# Altium PCB PCB_version_1.1.PcbDoc
Units mm, origin at the board's own origin, x right, y up, seen from the top; angles counter-clockwise.
Board outline 218.55 x 75.78 mm, 2 copper layers (Top Layer, Bottom Layer), stack 1.571 mm thick; 15 components, 68 nets, 287 pads, 0 vias.
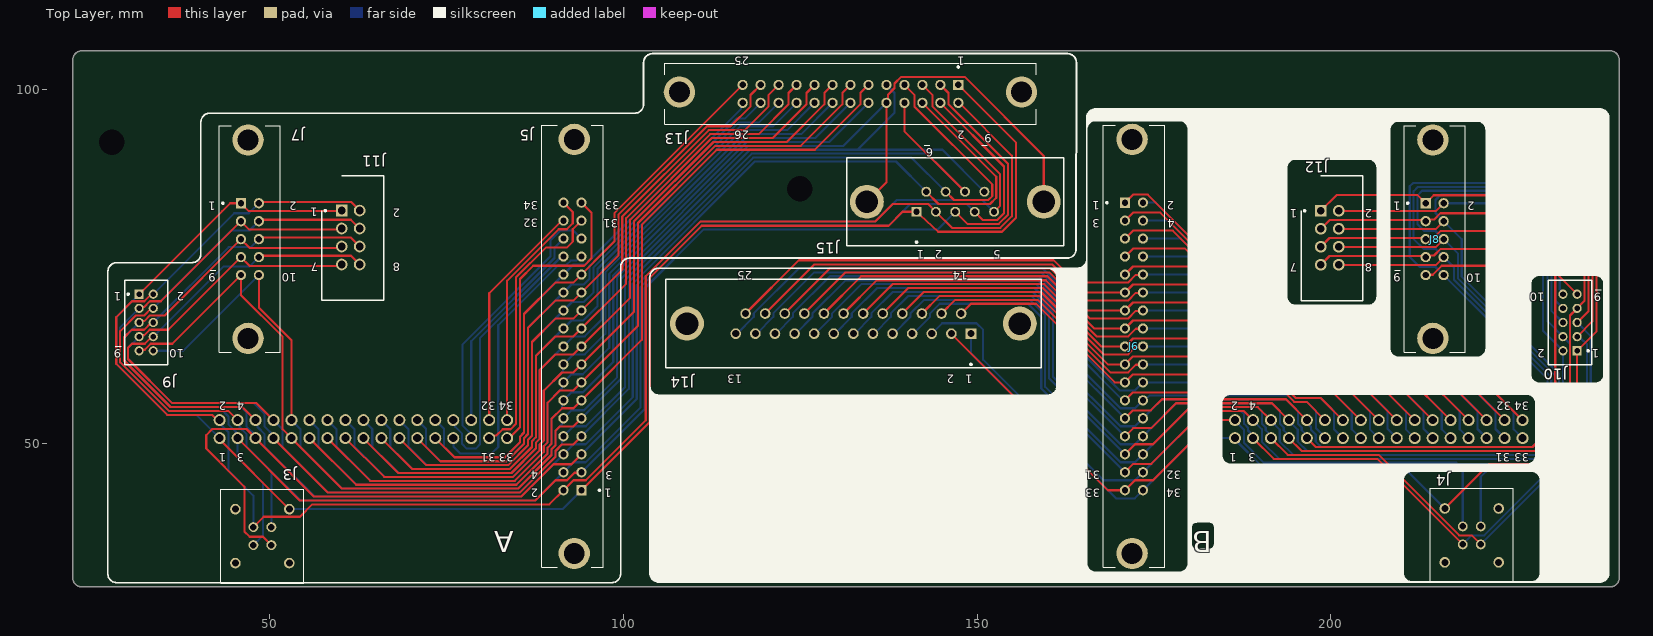
[diagram p0: Top Layer view]
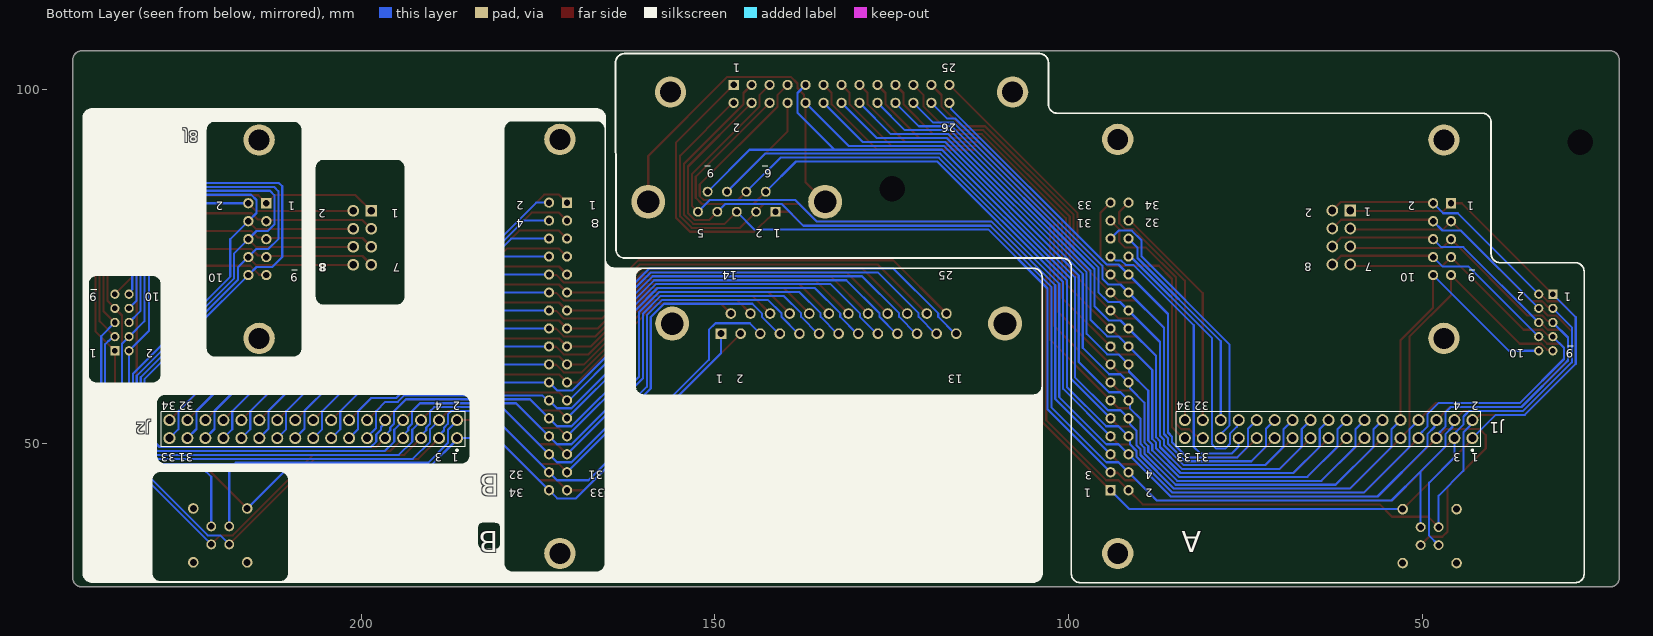
[diagram p1: Bottom Layer view, seen from below]
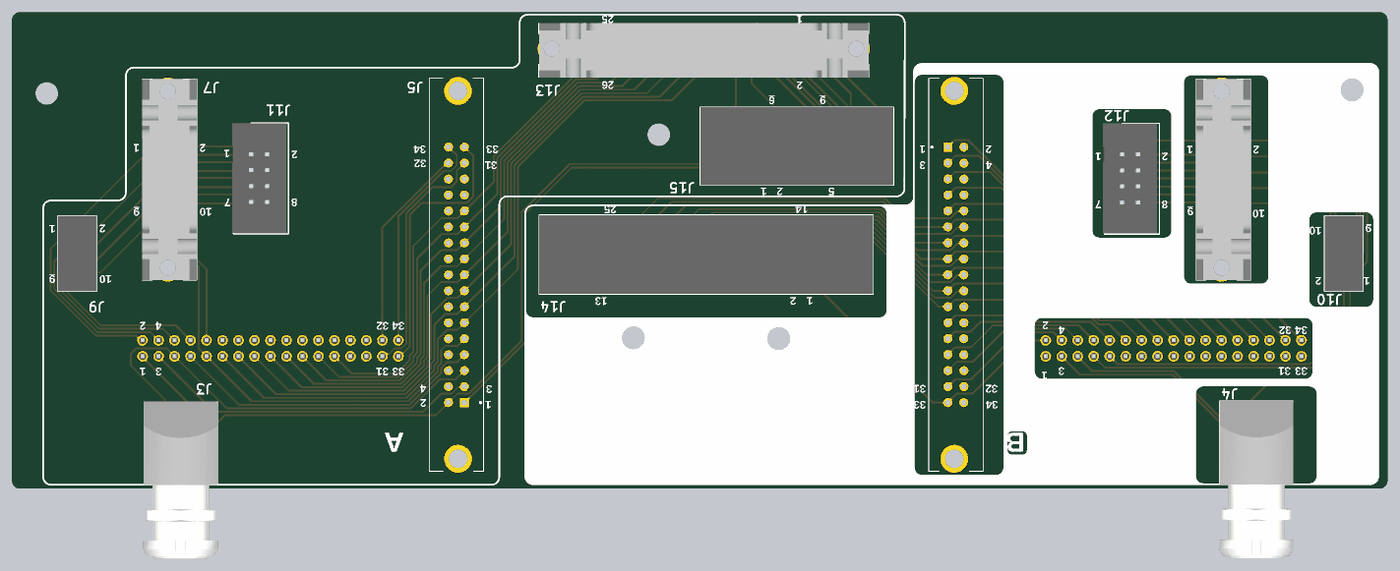
[diagram p2: 3D render of the assembled board from above, using the file's embedded part models]

## Layer stack, top to bottom
Top Solder: solder mask 0.0102, Solder Resist, Dk 3.5
Top Layer: signal copper 0.0356
Dielectric 1: dielectric 1.5, FR-4, Dk 4.8
Bottom Layer: signal copper 0.0356
Bottom Solder: solder mask 0.0102, Solder Resist, Dk 3.5

## Board outline
23.47,29.725 25.67,29.725 27.42,29.725 39.622,29.725 42.325,29.725 215.35,29.725 229.58,29.725 239.48,29.725 ccw(c239.48,30.995) 240.75,30.995 240.75,43.368 240.75,95 240.75,104.23 ccw(c239.48,104.23) 239.48,105.5 229.58,105.5 27.42,105.5 25.67,105.5 23.47,105.5 ccw(c23.47,104.23) 22.2,104.23 22.2,99.772 22.2,36.482 22.2,30.995 ccw(c23.47,30.995)

## Design rules (kind name [scope] priority, off if disabled: settings)
Clearance [All] p1: gap=0.1 ignorepadtopadclearanceinfootprint=FALSE except(0.254: Arc-Arc Arc-Track Track-Track)
HoleSize [All] p1: absolutevalues=TRUE maxlimit=6 minlimit=0.2 maxpercent=80.000 minpercent=20.000
PolygonConnect [All] p1: connectstyle=Relief reliefconductorwidth=0.254 reliefentries=4 polygonreliefangle="90 Angle" airgapwidth=0.254
RoutingVias [All] p1: holewidth=0.711 width=1.27 viastyle="Through Hole" minholewidth=0.711 minwidth=1.27 maxholewidth=0.711 maxwidth=1.27
SilkToSilkClearance SilkToSilkClearance_BottomOverlay [IsObjectKind('Text') And OnLayer('Bottom Overlay')] p1: silktosilkclearance=0
SilkToSilkClearance SilkToSilkClearance_TopOverlay [IsObjectKind('Text') And OnLayer('Top Overlay')] p2: silktosilkclearance=0
SilkToSilkClearance [All] p3: silktosilkclearance=0.254
SolderMaskExpansion [All] p1: expansion=0.102 istentingtop=FALSE
Width [All] p1: maxlimit=10 minlimit=0.1 preferedwidth=0.3
28 further rules are at their usual default settings.

## Components (designator, comment, footprint, x,y, rotation, side; value= is the part's Value field where it differs from the comment)
J1 "ESQ-117-33-T-D" ESQ-117-Y-X-D 42.95,50.757 r180 bottom locked
J2 "ESQ-117-33-T-D" ESQ-117-Y-X-D 186.45,50.757 r180 bottom
J3 "EXP.0S.304.HLN" EXP0S304HLN 50.26,38.18 r270 top
J4 "EXP.0S.304.HLN" EXP0S304HLN 221.18,38.28 r270 top
J5 "D3431-6002-AR" D3431-6002-AR 94.085,43.4 r90 top locked
J6 "D3431-6002-AR" D3431-6002-AR 170.9,84.04 r270 top
J7 "D3793-6002-AR" D3793-6002-AR 45.96,83.96 r270 top
J8 "D3793-6002-AR" D3793-6002-AR 213.4,83.96 r270 top
J9 "98414-G08-10LF" 98414G0810LF 31.575,71.1 r270 top
J10 "98414-G08-10LF" 98414G0810LF 234.8,63.1 r90 top
J11 "N2508-6002-RB" SHDR8W64P254_2X4_1748X859X1004P 60.2,82.92 r270 top
J12 "N2508-6002-RB" SHDR8W64P254_2X4_1748X859X1004P 198.58,82.883 r270 top
J13 "D3429-6302-AR" D34296302AR 147.35,100.682 r180 top locked
J14 "L17HTNBHPOL2RM84C" L17HTNBHPOL2RM84C 149.135,65.527 r180 top locked
J15 "L177DFE09ST" L177DFE09ST 141.44,82.747 r180 top

## Footprints (in the part's own frame and the unit in brackets; to place one, negate y for a bottom-side part, rotate by r counter-clockwise, add the part's x,y. Pads: shape width x height; smd on the part's side, far side on the other; paste and mask are expansions set on the pad)
98414G0810LF [mm]
  rect 1.3x1.3 hole 0.8: A1(0,0)
  round 1.3 hole 0.8: A2(2,0) A3(4,0) A4(6,0) A5(8,0) B1(0,2) B2(2,2) B3(4,2) B4(6,2) B5(8,2)
  silkscreen extent -2,-2.05 10,4.05, body extent -2,-2.05 10,4.05, height 6.3
D3431-6002-AR [mm]
  rect 1.446x1.446 hole 0.89: 1(0,0)
  round 1.446 hole 0.89: 2(0,2.54) 3(2.54,0) 4(2.54,2.54) 5(5.08,0) 6(5.08,2.54) 7(7.62,0) 8(7.62,2.54) 9(10.16,0) 10(10.16,2.54) 11(12.7,0) 12(12.7,2.54) 13(15.24,0) 14(15.24,2.54) 15(17.78,0) 16(17.78,2.54) 17(20.32,0) 18(20.32,2.54) 19(22.86,0) 20(22.86,2.54) 21(25.4,0) 22(25.4,2.54) 23(27.94,0) 24(27.94,2.54) 25(30.48,0) 26(30.48,2.54) 27(33.02,0) 28(33.02,2.54) 29(35.56,0) 30(35.56,2.54) 31(38.1,0) 32(38.1,2.54) 33(40.64,0) 34(40.64,2.54)
  round 4.425 hole 2.95: MH1(-8.941,1.016) MH2(49.581,1.016)
  silkscreen extent -10.92,-3.05 51.56,5.59
D3793-6002-AR [mm] "Connector"
  rect 1.446x1.446 hole 0.89: 1(0,0)
  round 1.446 hole 0.89: 2(0,2.54) 3(2.54,0) 4(2.54,2.54) 5(5.08,0) 6(5.08,2.54) 7(7.62,0) 8(7.62,2.54) 9(10.16,0) 10(10.16,2.54)
  round 4.425 hole 2.95: MH1(-8.941,1.016) MH2(19.101,1.016)
  silkscreen extent -10.92,-3.05 21.08,5.59, body extent -10.93,-3.06 21.08,5.58, height 17.27
D34296302AR [mm]
  rect 1.446x1.446 hole 0.89: 1(0,0)
  round 1.446 hole 0.89: 2(0,2.54) 3(2.54,0) 4(2.54,2.54) 5(5.08,0) 6(5.08,2.54) 7(7.62,0) 8(7.62,2.54) 9(10.16,0) 10(10.16,2.54) 11(12.7,0) 12(12.7,2.54) 13(15.24,0) 14(15.24,2.54) 15(17.78,0) 16(17.78,2.54) 17(20.32,0) 18(20.32,2.54) 19(22.86,0) 20(22.86,2.54) 21(25.4,0) 22(25.4,2.54) 23(27.94,0) 24(27.94,2.54) 25(30.48,0) 26(30.48,2.54)
  round 4.425 hole 2.95: MH1(-8.941,1.016) MH2(39.421,1.016)
  silkscreen extent -10.98,-3.03 41.46,5.57, body extent -10.96,-3.07 41.36,5.57, height 17.27
ESQ-117-Y-X-D [mm]
  round 1.7 hole 1.15: 1(0,0) 2(0,2.54) 3(-2.54,0) 4(-2.54,2.54) 5(-5.08,0) 6(-5.08,2.54) 7(-7.62,0) 8(-7.62,2.54) 9(-10.16,0) 10(-10.16,2.54) 11(-12.7,0) 12(-12.7,2.54) 13(-15.24,0) 14(-15.24,2.54) 15(-17.78,0) 16(-17.78,2.54) 17(-20.32,0) 18(-20.32,2.54) 19(-22.86,0) 20(-22.86,2.54) 21(-25.4,0) 22(-25.4,2.54) 23(-27.94,0) 24(-27.94,2.54) 25(-30.48,0) 26(-30.48,2.54) 27(-33.02,0) 28(-33.02,2.54) 29(-35.56,0) 30(-35.56,2.54) 31(-38.1,0) 32(-38.1,2.54) 33(-40.64,0) 34(-40.64,2.54)
  silkscreen extent -41.82,-1.83 1.18,3.74, body extent -42.14,-1.25 1.54,3.83, height 1.81
EXP0S304HLN [mm]
  round 1.4 hole 0.9: 1(0,0) 2(0,-2.54) 3(2.54,-2.54) 4(2.54,0)
  round 1.5 hole 1: G1(-2.54,2.54) G2(-2.54,-5.08) G3(5.08,-5.08) G4(5.08,2.54)
  silkscreen extent -5.38,-7.12 7.92,4.58, body extent -5.38,-7.19 19.62,4.65, height 13.78
L17HTNBHPOL2RM84C [mm]
  rect 1.5x1.5 hole 1: 1(0,0)
  round 1.5 hole 1: 2(2.77,0) 3(5.54,0) 4(8.31,0) 5(11.08,0) 6(13.85,0) 7(16.62,0) 8(19.39,0) 9(22.16,0) 10(24.93,0) 11(27.7,0) 12(30.47,0) 13(33.24,0) 14(1.385,-2.84) 15(4.155,-2.84) 16(6.925,-2.84) 17(9.695,-2.84) 18(12.465,-2.84) 19(15.235,-2.84) 20(18.005,-2.84) 21(20.775,-2.84) 22(23.545,-2.84) 23(26.315,-2.84) 24(29.085,-2.84) 25(31.855,-2.84)
  round 4.8 hole 3.2: MH1(-6.9,-1.42) MH2(40.14,-1.42)
  silkscreen extent -9.9,-7.7 43.14,4.85, body extent -9.9,-7.7 43.14,4.85, height 12.6
L177DFE09ST [mm]
  rect 1.4x1.4 hole 0.9: 1(0,0)
  round 1.4 hole 0.9: 2(-2.74,0) 3(-5.48,0) 4(-8.22,0) 5(-10.96,0) 6(-1.37,-2.84) 7(-4.11,-2.84) 8(-6.85,-2.84) 9(-9.59,-2.84)
  round 4.8 hole 3.2: MH1(7.02,-1.42) MH2(-17.98,-1.42)
  silkscreen extent -20.83,-7.62 9.87,4.78, body extent -20.83,-7.62 9.87,4.78, height 12.3
SHDR8W64P254_2X4_1748X859X1004P [mm]
  rect 1.65x1.65 hole 1.1: 1(0,0)
  round 1.65 hole 1.1: 2(0,2.54) 3(2.54,0) 4(2.54,2.54) 5(5.08,0) 6(5.08,2.54) 7(7.62,0) 8(7.62,2.54)
  silkscreen extent -4.93,-2.8 12.68,5.92, body extent -4.93,-3.03 12.55,5.57, height 10.04

## Part data
J1 J2: "Connector", Manufacturer_Name=SAMTEC, Manufacturer_Part_Number=ESQ-117-44-T-D, Mouser Part Number=200-ESQ11744TD, Datasheet Link=http://suddendocs.samtec.com/prints/esq-1xx-xx-x-x-xxx-xx-x-xx-mkt.pdf, Mouser Price/Stock=https://www.mouser.com/Search/Refine.aspx?Keyword=200-ESQ11744TD
J3 J4: "Connector", Manufacturer_Name=LEMO, Mouser Part Number=736-EXP0S304HLN, Datasheet Link=https://www.lemo.com/catalog/ROW/UK_English/unipole_multipole.pdf, Height=12mm, Manufacturer_Part_Number=EXP.0S.304.HLN, Mouser Price/Stock=https://www.mouser.co.uk/ProductDetail/LEMO/EXP0S304HLN?qs=g4eXmMl0IezC49McAy%252Bbog%3D%3D
J5 J6 J7 J8: "Connector"
J9 J10: "Connector", Manufacturer_Name=Amphenol, Mouser Part Number=649-98414-G08-10LF, Datasheet Link=https://cdn.amphenol-cs.com/media/wysiwyg/files/drawing/98414.pdf, Height=6.2mm, Manufacturer_Part_Number=98414-G08-10LF, Mouser Price/Stock=https://www.mouser.co.uk/ProductDetail/Amphenol-FCI/98414-G08-10LF?qs=dwWE9K4rTrPm8sS0qAKvPg%3D%3D
J11 J12: "Connector", Manufacturer_Name=3M, Mouser Part Number=517-N2508-6002-RB, Datasheet Link=https://multimedia.3m.com/mws/media/330367O/3m-four-wall-header-2500-series-ts-0770.pdf, Height=10.04mm, Manufacturer_Part_Number=N2508-6002-RB, Mouser Price/Stock=https://www.mouser.com/Search/Refine.aspx?Keyword=517-N2508-6002-RB
J13: "Connector", Manufacturer_Name=3M, Mouser Part Number=517-D3429-6302-AR, Datasheet Link=http://multimedia.3m.com/mws/media/485761O/3mtm-four-wall-header-ts2245.pdf, Height=13.7mm, Manufacturer_Part_Number=D3429-6302-AR, Mouser Price/Stock=https://www.mouser.co.uk/ProductDetail/3M-Electronic-Solutions-Division/D3429-6302-AR?qs=IDj0%2FmHVFfaTU4HTZsyChw%3D%3D
J14: "Connector", Manufacturer_Name="Amphenol Communications Solutions", Mouser Part Number=523-17HTNBHPOL2RM84C, Datasheet Link=https://cdn.amphenol-cs.com/media/wysiwyg/files/drawing/l17htnxhpol2rm8xc.pdf, Height=12.5mm, Manufacturer_Part_Number=L17HTNBHPOL2RM84C, Mouser Price/Stock=https://www.mouser.co.uk/ProductDetail/Amphenol-Commercial-Products/L17HTNBHPOL2RM84C?qs=ToP8pWlZ0bO6Ujv8%2FJibmw%3D%3D
J15: "Connector", Manufacturer_Name=Amphenol, Datasheet Link=https://cdn.amphenol-cs.com/media/wysiwyg/files/drawing/l177dfxxxst.pdf, Height=12.2mm, Manufacturer_Part_Number=L177DFE09ST

## Free pads (board coordinates)
  round 0 hole 3.6 unplated: HOLE1(120.925,53.7) HOLE2(144.025,53.575) HOLE3(27.73,92.566) HOLE4(235.12,93.137) HOLE5(124.97,86.007)

## Nets (pads, with @x,y where several pads share a name; then routed paths per layer and width w, separated by ;. In a path a pad name is that pad's centre, name@x,y a point inside that pad or via, vN(x,y) a via of type N, cw(c..) or ccw(c..) an arc to the next point about the centre after c; other vN are vias at no path point)
PA1: J1.1 J3.G1 J5.1 J7.1 J9.A1 J11.1 J13.1 J15.1 | length 234.8
  Top Layer w0.3: J9.A1 32.075,71.6 43.308,82.833 44.435,83.96 J7.1 47.087,82.833 60.113,82.833 J11.1 ; J1.1 42.95,50.57 J3.G1 ; J5.1 103.732,53.047 103.732,73.422 111.089,80.779 137.501,80.779 139.469,82.747 J15.1 141.99,82.243 144.517,79.925 153.525,79.925 155.475,81.875 155.475,92.557 J13.1
  Bottom Layer w0.3: J9.A1 28.338,67.863 28.338,61.262 35.55,54.05 39.657,54.05 J1.1 ; J3.G1 91.405,40.72 J5.1
PA2: J1.2 J3.2 J5.2 J7.2 J9.B1 J11.2 J13.2 J15.2 | length 242.6
  Top Layer w0.3: J9.B1 33.307,71.1 32.307,70.1 30.575,70.1 28.338,67.863 28.338,61.262 35.55,54.05 41.865,54.05 42.618,53.297 J1.2 ; J3.2 49.19,39.65 54.304,39.65 56.052,41.398 89.543,41.398 J5.2 92.958,44.813 94.715,44.813 103.178,53.276 103.178,73.651 110.889,81.363 134.403,81.363 ccw(c134.42,84.167) 134.437,81.363 135.582,81.363 138.069,83.851 143.076,83.851 J15.2 144.18,82.745 146.446,80.479 153.296,80.479 154.921,82.104 154.921,90.684 147.463,98.142 J13.2 ; J7.2 48.689,84.149 61.511,84.149 J11.2
  Bottom Layer w0.3: J9.B1@33.617,71.142 45.022,82.547 47.087,82.547 J7.2 ; J1.2 42.95,52.826 44.225,51.551 44.225,46.125 47.72,42.63 J3.2
PA3: J1.3 J3.3 J5.3 J7.3 J9.A2 J11.3 J13.3 J15.3 | length 245.2
  Top Layer w0.3: J9.A2 31.766,69.291 32.282,69.291 33.09,70.1 34.64,70.1 J7.3 47.155,80.225 60.045,80.225 J11.3 ; J1.3 54.295,41.952 87.557,41.952 90.418,44.813 92.038,44.813 93.096,45.871 94.016,45.871 J5.3 ; J13.3 145.956,99.536 145.956,97.942 154.367,89.531 154.367,82.334 153.066,81.033 148.634,81.033 J15.3
  Bottom Layer w0.3: J9.A2 28.892,66.417 28.892,61.491 35.779,54.604 43.41,54.604 43.753,54.261 43.79,54.227 cw(c42.95,53.297) 43.881,54.137 43.914,54.1 44.137,53.877 44.225,53.789 44.225,52.664 45.222,51.667 45.222,51.024 J1.3 45.49,48.03 49.064,44.456 49.064,36.984 J3.3@47.729,35.649 ; J5.3@94.095,45.94 103.006,54.851 103.006,71.913 111.318,80.225 144.398,80.225 J15.3
PA4: J1.4 J3.1 J5.4 J7.4 J9.B2 J11.4 J13.4 J15.4 | length 235.6
  Top Layer w0.3: J9.B2 33.307,69.1 32.307,68.1 31.115,68.1 28.892,65.877 28.892,61.491 35.779,54.604 44.183,54.604 J1.4 ; J7.4 48.705,81.625 61.495,81.625 J11.4 ; J13.4 153.813,89.139 153.813,82.563 152.837,81.587 150.82,81.587 J15.4
  Bottom Layer w0.3: J9.B2 44.575,80.1 47.18,80.1 J7.4 ; J1.4 45.758,53.029 45.758,52.333 46.776,51.315 46.776,49.552 50.272,46.055 ; J3.1 50.26,46.043 50.272,46.055 ; J15.4 148.556,83.851 140.573,83.851 137.501,80.779 111.089,80.779 102.452,72.142 102.452,55.133 94.672,47.353 92.958,47.353 J5.4 87.557,41.952 54.376,41.952 50.272,46.055
PA5: J1.5 J3.4 J5.5 J7.5 J9.A3 J11.5 J13.5 J15.5 | length 251.3
  Top Layer w0.3: J9.A3 31.766,67.291 32.282,67.291 33.09,68.1 35.18,68.1 J7.5 47.215,77.625 59.985,77.625 J11.5 ; J3.4 49.082,36.818 47.185,36.818 46.45,37.554 46.45,43.9 41.057,49.293 41.057,51.182 41.921,52.047 42.85,52.047 ccw(c42.95,53.297) 42.95,52.043 45.49,52.043 ccw(c45.49,53.297) 45.495,52.043 46.491,52.047 46.74,52.047 J1.5 56.279,42.508 85.573,42.508 90.132,47.067 92.672,47.067 J5.5 ; J13.5 143.683,99.269 143.683,97.642 153.259,88.066 153.259,83.606 J15.5
  Bottom Layer w0.3: J9.A3 29.446,64.971 29.446,61.721 29.875,61.292 36.009,55.158 46.002,55.158 46.776,54.384 46.776,52.389 48.03,51.135 J1.5 ; J5.5 101.898,56.293 101.898,72.372 110.889,81.363 134.403,81.363 ccw(c134.42,84.167) 134.437,81.363 135.582,81.363 138.628,84.41 150.737,84.41 J15.5
PA6: J1.6 J5.6 J7.6 J9.B3 J11.6 J13.6 J15.6 | length 225.1
  Top Layer w0.3: J9.B3 33.304,67.1 32.279,66.075 30.55,66.075 29.446,64.971 29.446,61.721 36.009,55.158 46.169,55.158 J1.6 ; J7.6 48.719,79.099 49.238,79.099 49.249,79.11 61.47,79.11 J11.6 ; J13.6 152.705,87.707 152.705,84.737 151.819,83.851 144.546,83.851 J15.6
  Bottom Layer w0.3: J9.B3 44.228,77.753 47.373,77.753 J7.6@48.48,78.86 ; J1.6 48.298,53.029 48.298,52.333 49.316,51.315 49.316,49.552 56.362,42.506 85.571,42.506 J5.6 92.958,49.893 94.676,49.893 101.344,56.561 101.344,72.601 118.593,89.85 138.547,89.85 J15.6
PA7: J1.7 J5.7 J7.7 J9.A4 J11.7 J13.7 J15.7 | length 221.4
  Top Layer w0.3: J9.A4 31.766,65.291 32.279,65.291 33.063,66.075 35.695,66.075 J7.7 47.225,75.075 59.975,75.075 J11.7 ; J1.7 58.265,43.062 85.344,43.062 90.418,48.136 90.418,48.947 91.326,49.855 92.92,49.855 J5.7 ; J13.7 141.143,99.269 141.143,97.632 152.151,86.624 152.151,84.967 151.589,84.405 146.732,84.405 J15.7
  Bottom Layer w0.3: J9.A4 30,63.525 30,61.95 36.238,55.712 47.751,55.712 49.316,54.147 49.316,53.297 49.316,52.389 50.57,51.135 J1.7 ; J5.7 100.79,57.725 100.79,72.831 118.363,90.404 140.733,90.404 J15.7
PA8: J1.8 J5.8 J7.8 J9.B4 J11.8 J13.8 J15.8 | length 215.8
  Top Layer w0.3: J9.B4 33.367,65.1 32.367,64.1 30.575,64.1 30,63.525 30,61.95 36.238,55.712 48.155,55.712 J1.8 ; J7.8 48.689,76.529 61.511,76.529 J11.8 ; J13.8 139.73,94.147 J15.8
  Bottom Layer w0.3: J9.B4 43.475,75 47.16,75 J7.8 ; J1.8 51.824,52.043 51.824,49.552 58.316,43.06 85.342,43.06 90.418,48.136 90.418,48.947 91.326,49.855 91.326,50.801 92.958,52.433 94.715,52.433 100.236,57.954 100.236,73.06 118.134,90.958 142.919,90.958 J15.8
PA9: J1.9 J5.9 J7.9 J9.A5 J13.9 J15.9 | length 189.8
  Top Layer w0.3: J9.A5 31.728,63.253 32.378,63.253 33.225,64.1 36.26,64.1 J7.9 45.96,70.982 51.85,65.092 51.85,52.017 J1.9 60.251,43.616 85.114,43.616 89.864,48.366 89.864,49.176 90.418,49.73 90.418,51.787 91.039,52.407 92.932,52.407 J5.9
  Bottom Layer w0.3: J5.9 99.682,59.157 99.682,73.289 117.904,91.512 133.1,91.512 ; J13.9 138.336,99.536 138.336,96.748 133.1,91.512 ; J15.9 145.105,91.512 133.1,91.512
PA10: J1.10 J5.10 J7.10 J9.B5 J13.10 J15.MH1 J15.MH2 | length 215.1
  Top Layer w0.3: J7.10 48.5,69.225 53.11,64.615 J1.10 ; J15.MH1 137.19,86.937 J13.10 137.409,98.361 137.409,99.307 138.336,100.234 138.336,100.882 139.263,101.809 148.24,101.809 159.42,90.629 J15.MH2
  Bottom Layer w0.3: J9.B5 37.8,63.1 J7.10 ; J1.10 54.364,52.043 54.364,49.552 60.302,43.614 85.112,43.614 89.864,48.366 89.864,49.176 90.418,49.73 90.418,51.787 91.339,52.707 J5.10@91.339,53.654 ; J5.10 92.691,54.706 94.448,54.706 99.128,59.386 99.128,73.519 117.675,92.066 131.114,92.066 J13.10
PA11: J1.11 J5.11 J13.11 | length 118.1
  Top Layer w0.3: J1.11 62.237,44.17 84.885,44.17 89.31,48.595 89.31,49.406 89.864,49.96 89.864,53.473 91.364,54.973 92.958,54.973 J5.11 94.947,56.962 102.624,64.639 102.624,80.932 113.204,91.512 127.074,91.512 133.504,97.942 133.504,99.536 J13.11
PA12: J1.12 J5.12 J13.12 | length 116.9
  Bottom Layer w0.3: J1.12 56.904,52.043 56.904,49.552 62.288,44.168 84.583,44.168 84.883,44.168 89.31,48.595 89.31,49.406 89.864,49.96 89.864,53.473 91.326,54.935 91.326,56.181 J5.12@91.339,56.194 ; J5.12 92.691,57.246 94.296,57.246 98.574,61.524 98.574,73.748 117.446,92.62 129.128,92.62 J13.12
PA13: J1.13 J5.13 J13.13 | length 112.8
  Top Layer w0.3: J1.13 64.223,44.724 84.655,44.724 88.756,48.825 88.756,49.635 89.31,50.189 89.31,55.759 91.064,57.513 92.958,57.513 102.07,66.625 102.07,80.369 102.07,81.162 112.974,92.066 113.767,92.066 125.088,92.066 130.964,97.942 130.964,99.536 J13.13
PA14: J1.14 J5.14 J13.14 | length 111.3
  Bottom Layer w0.3: J1.14 59.476,52.011 59.476,49.552 64.306,44.722 84.353,44.722 84.653,44.722 88.756,48.825 88.756,49.635 89.31,50.189 89.31,55.759 91.339,57.787 91.339,58.434 92.691,59.786 94.286,59.786 98.02,63.52 98.02,73.978 117.216,93.174 127.142,93.174 J13.14
PA15: J1.15 J5.15 J13.15 | length 107.1
  Top Layer w0.3: J1.15 66.209,45.278 84.426,45.278 88.202,49.054 88.202,49.865 88.756,50.419 88.756,57.451 91.339,60.034 92.939,60.034 101.516,68.611 101.516,80.598 101.516,81.391 112.745,92.62 113.537,92.62 123.102,92.62 128.424,97.942 128.424,99.536 J13.15
PA16: J1.16 J5.16 J13.16 | length 105.8
  Bottom Layer w0.3: J1.16 62.016,52.011 62.016,49.552 66.292,45.276 84.124,45.276 84.424,45.276 88.202,49.054 88.202,49.865 88.756,50.419 88.756,57.451 91.488,60.183 91.488,61.123 92.958,62.593 94.568,62.593 97.466,65.491 97.466,74.207 116.987,93.728 125.156,93.728 J13.16
PA17: J1.17 J5.17 J13.17 | length 102.1
  Top Layer w0.3: J1.17 68.195,45.832 84.196,45.832 87.648,49.284 87.648,50.094 88.202,50.648 88.202,60.377 90.418,62.593 92.958,62.593 100.962,70.597 100.962,80.828 100.962,81.621 112.515,93.174 113.308,93.174 121.116,93.174 125.884,97.942 125.884,99.536 J13.17
PA18: J1.18 J5.18 J13.18 | length 100.2
  Bottom Layer w0.3: J1.18 64.524,52.043 64.524,49.552 68.246,45.83 83.894,45.83 84.194,45.83 87.648,49.284 87.648,50.094 88.202,50.648 88.202,60.377 J5.18 92.958,65.133 94.558,65.133 96.912,67.487 96.912,74.437 116.757,94.282 123.17,94.282 J13.18
PA19: J1.19 J5.19 J13.19 | length 96.5
  Top Layer w0.3: J1.19 70.181,46.386 83.967,46.386 87.094,49.513 87.094,50.324 87.648,50.878 87.648,62.363 90.399,65.114 92.939,65.114 100.408,72.583 100.408,81.057 100.408,81.85 112.286,93.728 113.078,93.728 119.13,93.728 123.344,97.942 123.344,99.536 J13.19
PA20: J1.20 J5.20 J13.20 | length 94.7
  Bottom Layer w0.3: J1.20 67.064,52.043 67.064,49.552 70.232,46.384 83.665,46.384 83.965,46.384 87.094,49.513 87.094,50.324 87.648,50.878 87.648,62.363 J5.20 92.672,67.387 94.348,67.387 96.358,69.397 96.358,74.666 116.528,94.836 121.184,94.836 J13.20
PA21: J1.21 J5.21 J13.21 | length 91
  Top Layer w0.3: J1.21 72.167,46.94 83.737,46.94 86.54,49.743 86.54,50.553 87.094,51.107 87.094,64.349 90.399,67.654 92.939,67.654 99.854,74.569 99.854,81.287 99.854,82.08 112.056,94.282 112.849,94.282 117.144,94.282 120.537,97.675 120.537,99.269 J13.21
PA22: J1.22 J5.22 J13.22 | length 89.2
  Bottom Layer w0.3: J1.22 69.636,52.011 69.636,49.552 72.25,46.938 83.435,46.938 83.735,46.938 86.54,49.743 86.54,50.553 87.094,51.107 87.094,64.349 J5.22 92.745,70 94.421,70 95.804,71.383 95.804,74.896 116.298,95.39 119.198,95.39 J13.22
PA23: J1.23 J5.23 J13.23 | length 85.5
  Top Layer w0.3: J1.23 74.153,47.494 83.508,47.494 85.97,49.956 85.97,50.767 86.54,51.337 86.54,66.335 90.399,70.194 92.939,70.194 99.3,76.555 99.3,81.516 99.3,82.309 111.827,94.836 112.619,94.836 115.158,94.836 117.997,97.675 117.997,98.637 117.981,98.653 117.981,99.253 J13.23
PA24: J1.24 J5.24 J13.24 | length 83.7
  Bottom Layer w0.3: J1.24 72.144,52.043 72.144,49.552 74.204,47.492 83.206,47.492 83.506,47.492 85.97,49.956 85.97,50.767 86.54,51.337 86.54,66.335 J5.24 92.672,72.467 94.392,72.467 95.25,73.325 95.25,75.125 116.069,95.944 117.212,95.944 J13.24
PA25: J1.25 J5.25 J13.25 | length 79
  Top Layer w0.3: J1.25 76.139,48.048 83.278,48.048 85.398,50.168 85.398,50.978 85.97,51.55 85.97,68.305 90.399,72.734 92.939,72.734 98.746,78.541 98.746,82.558 J13.25
PA26: J1.26 J5.26 J13.26 | length 78.5
  Bottom Layer w0.3: J1.26 74.684,52.043 74.684,49.552 76.19,48.046 83.276,48.046 85.398,50.168 85.398,50.978 85.97,51.55 85.97,68.305 J5.26 92.958,75.293 94.634,75.293 116.651,97.309 116.651,97.923 J13.26
PA27: J1.27 J5.27 | length 41.3
  Bottom Layer w0.3: J1.27 75.994,50.732 75.994,49.527 76.922,48.6 81.433,48.6 82.336,49.503 82.336,66.706 90.87,75.24 91.959,75.24 92.566,75.847 93.336,75.847 93.909,76.42 J5.27
PA28: J1.28 J5.28 | length 38.5
  Bottom Layer w0.3: J1.28 76.238,53.029 76.238,52.362 77.224,51.376 77.224,49.939 77.888,49.275 79.127,49.275 79.775,49.923 79.775,64.929 91.266,76.42 J5.28
PA29: J1.29 J5.29 | length 39
  Bottom Layer w0.3: J1.29 78.242,51.024 78.242,51.61 77.256,52.596 77.256,63.977 89.719,76.44 89.719,78.728 91.078,80.087 92.958,80.087 J5.29
PA30: J1.30 J5.30 | length 31.1
  Bottom Layer w0.3: J1.30 78.51,64.447 90.273,76.21 90.273,77.688 J5.30
PA31: J1.31 J5.31 | length 38.9
  Top Layer w0.3: J1.31 81.429,50.757 81.815,51.143 82.091,51.143 82.959,52.011 84.077,52.011 84.844,52.777 84.844,73.477 89.055,77.688 92.017,77.688 92.86,78.531 92.86,80.275 J5.31
PA32: J1.32 J5.32 | length 32.7
  Top Layer w0.3: J1.32 81.05,71.25 91.3,81.5 J5.32
PA33: J1.33 J5.33 | length 42.9
  Top Layer w0.3: J1.33@83.808,50.974 84.061,50.974 85.398,52.311 85.398,73.248 87.275,75.125 94.467,75.125 95.5,76.159 95.5,82.625 J5.33
PA34: J1.34 J5.34 | length 35.8
  Top Layer w0.3: J1.34 83.59,73.007 90.858,80.275 92.016,80.275 92.86,81.119 92.86,82.725 J5.34
PB1: J2.1 J4.G2 J6.34 J8.1 J10.A1 J12.1 J14.1 | length 182.6
  Top Layer w0.3: J12.1 200.797,85.1 212.26,85.1 J8.1 214.527,85.087 235.013,85.087 237.516,82.584 237.516,65.816 J10.A1 234.8,52.424 229.476,47.1 222.38,47.1 J4.G2
  Bottom Layer w0.3: J14.1 149.135,62.757 169.642,42.25 172.29,42.25 J6.34 180.797,50.757 J2.1 186.45,50.567 190.292,46.725 210.195,46.725 J4.G2
PB2: J2.2 J4.2 J6.33 J8.2 J10.B1 J12.2 J14.2 | length 176.7
  Top Layer w0.3: J14.2 168.492,43.4 J6.33 172.313,44.813 174.853,44.813 183.337,53.297 J2.2 ; J12.2 201.17,82.833 214.813,82.833 J8.2
  Bottom Layer w0.3: J2.2 186.45,53.198 187.736,51.912 187.736,50.064 190.521,47.279 217.726,47.279 217.905,47.1 ; J8.2 227.79,83.96 230,81.75 230,65.9 J10.B1 232.8,60.074 232.816,60.058 232.816,50.44 229.476,47.1 217.905,47.1 ; J4.2 218.64,46.365 217.905,47.1
PB3: J2.3 J4.3 J6.32 J8.3 J10.A2 J12.3 J14.3 | length 195.2
  Top Layer w0.3: J2.3 191.914,47.833 206.547,47.833 J4.3 ; J12.3 199.809,81.572 213.248,81.572 J8.3 213.619,81.639 214.565,81.639 215.473,82.547 234.653,82.547 236.962,80.238 236.962,67.262 J10.A2
  Bottom Layer w0.3: J14.3 145.068,67 149.916,67 150.85,66.066 150.85,61.825 167.862,44.813 172.313,44.813 J6.32 182.087,54.587 187.26,54.587 187.736,54.111 187.736,52.778 188.298,52.216 188.298,51.828 188.99,51.136 J2.3 ; J4.3 219.915,37.015 221.672,37.015 236.175,51.518 236.175,64.025 235.733,64.467 235.704,64.467 235.071,65.1 J10.A2
PB4: J2.4 J4.1 J6.31 J8.4 J10.B2 J12.4 J14.4 | length 246
  Top Layer w0.3: J6.31 172.085,47.125 174.625,47.125 182.087,54.587 187.7,54.587 J2.4 ; J12.4 201.17,80.293 214.813,80.293 J8.4
  Bottom Layer w0.3: J14.4 141.002,65.527 143.364,67.889 143.364,68.383 144.732,69.751 157.196,69.751 159.064,67.883 159.064,57.776 J6.31 ; J2.4 188.99,53.28 190.244,52.026 190.244,50.27 192.681,47.833 229.373,47.833 232.262,50.722 232.262,59.828 218.5,73.59 218.5,78.86 J8.4 214.794,82.566 214.794,84.408 215.549,85.163 227.37,85.163 230.638,81.895 230.638,67.262 J10.B2 233.8,64.1 233.8,50.64 229.706,46.546 222.421,46.546 221.18,45.305 J4.1
PB5: J2.5 J4.4 J6.30 J8.5 J10.A3 J12.5 J14.5 | length 203.4
  Top Layer w0.3: J2.5 193.892,48.395 206.768,48.395 218.148,37.015 219.905,37.015 J4.4 ; J12.5 199.809,79.032 213.248,79.032 J8.5 213.619,79.099 214.565,79.099 215.473,80.007 234.393,80.007 236.408,77.992 236.408,68.708 J10.A3
  Bottom Layer w0.3: J14.5 138.232,65.527 140.594,67.889 140.594,68.383 142.516,70.305 157.426,70.305 159.618,68.113 159.618,58.005 170.27,47.353 172.313,47.353 J6.30 180.101,55.141 189.686,55.141 190.276,54.551 190.276,52.778 190.798,52.256 190.798,51.863 191.53,51.131 J2.5 ; J4.4 236.729,51.289 236.729,65.171 J10.A3
PB6: J2.6 J6.29 J8.6 J10.B3 J12.6 J14.6 | length 216
  Top Layer w0.3: J6.29 172.313,49.893 174.853,49.893 180.101,55.141 189.686,55.141 J2.6 ; J12.6 201.17,77.753 214.813,77.753 J8.6
  Bottom Layer w0.3: J14.6 135.462,65.527 137.824,67.889 137.824,68.383 140.3,70.859 157.655,70.859 160.172,68.342 160.172,59.208 J6.29 ; J2.6 191.53,53.198 192.784,51.944 192.784,50.27 194.659,48.395 229.039,48.395 231.708,51.064 231.708,59.599 217.946,73.361 217.946,76.874 214.794,80.026 213.174,80.026 212.258,80.942 212.258,85.098 212.877,85.717 227.6,85.717 231.192,82.125 231.192,68.708 J10.B3
PB7: J2.7 J6.28 J8.7 J10.A4 J12.7 J14.7 | length 189.2
  Top Layer w0.3: J2.7 195.878,48.949 229.593,48.949 233.8,53.156 233.8,68.1 J10.A4 235.854,70.154 235.854,75.746 234.1,77.5 215.506,77.5 214.565,76.559 213.619,76.559 J8.7 213.248,76.492 199.809,76.492 J12.7
  Bottom Layer w0.3: J14.7 132.692,65.527 135.054,67.889 135.054,68.383 138.084,71.413 157.885,71.413 160.726,68.572 160.726,59.437 170.27,49.893 172.313,49.893 J6.28 178.115,55.695 191.672,55.695 192.816,54.551 192.816,52.778 193.338,52.256 193.338,51.863 194.07,51.131 J2.7
PB8: J2.8 J6.27 J8.8 J10.B4 J12.8 J14.8 | length 218.9
  Top Layer w0.3: J6.27 172.055,52.175 174.595,52.175 178.115,55.695 191.672,55.695 J2.8 ; J12.8 201.17,75.213 214.813,75.213 J8.8
  Bottom Layer w0.3: J14.8 129.922,65.527 132.284,67.889 132.284,68.383 135.868,71.967 158.114,71.967 161.28,68.801 161.28,60.64 J6.27 ; J2.8 194.07,53.198 195.324,51.944 195.324,50.27 196.645,48.949 228.806,48.949 231.154,51.297 231.154,59.369 217.392,73.131 217.392,74.888 214.78,77.5 213.086,77.5 211.704,78.882 211.704,85.659 212.316,86.271 227.829,86.271 231.746,82.354 231.746,70.154 J10.B4
PB9: J2.9 J6.26 J8.9 J10.A5 J14.9 | length 173.3
  Top Layer w0.3: J2.9 197.864,49.503 228.503,49.503 231.708,52.708 231.708,74.192 ; J8.9 213.453,73.853 214.397,73.853 215.662,75.117 230.783,75.117 231.708,74.192 ; J10.A5 231.708,74.192
  Bottom Layer w0.3: J14.9 127.152,65.527 129.514,67.889 129.514,68.383 133.652,72.521 158.344,72.521 161.834,69.031 161.834,60.869 170.27,52.433 172.313,52.433 J6.26 176.129,56.249 193.658,56.249 195.356,54.551 195.356,52.778 195.878,52.256 195.878,51.863 196.61,51.131 J2.9
PB10: J2.10 J6.25 J8.10 J10.B5 J14.10 | length 206.8
  Top Layer w0.3: J6.25 172.027,54.687 174.567,54.687 176.129,56.249 193.658,56.249 J2.10
  Bottom Layer w0.3: J14.10 124.382,65.527 126.744,67.889 126.744,68.383 131.436,73.075 158.573,73.075 162.388,69.26 162.388,62.072 J6.25 ; J2.10 196.61,52.918 197.187,52.341 197.187,51.953 197.864,51.276 197.864,50.27 198.631,49.503 228.503,49.503 230.6,51.6 230.6,59.14 223.14,66.6 J8.10 214.794,74.946 212.554,74.946 211.15,76.35 211.15,86.35 211.625,86.825 228.059,86.825 232.34,82.544 232.34,71.776 232.8,71.316 J10.B5
PB11: J2.11 J6.24 J14.11 | length 98
  Bottom Layer w0.3: J14.11 121.612,65.527 123.974,67.889 123.974,68.383 129.22,73.629 158.803,73.629 162.942,69.49 162.942,62.301 170.27,54.973 172.313,54.973 J6.24 173.693,56.1 174.396,56.803 193.887,56.803 194.814,55.876 196.571,55.876 197.879,54.568 197.879,52.197 199.133,50.943 J2.11@199.133,50.774
PB12: J2.12 J6.23 J14.12 | length 97.5
  Top Layer w0.3: J6.23 172.027,57.227 193.463,57.227 194.814,55.876 196.571,55.876 J2.12
  Bottom Layer w0.3: J14.12 118.842,65.527 121.204,67.889 121.204,68.383 127.004,74.183 159.032,74.183 163.496,69.719 163.496,63.204 J6.23@170.6,56.1
PB13: J2.13 J6.22 J14.13 | length 106
  Bottom Layer w0.3: J14.13 116.072,65.527 118.434,67.889 118.434,68.383 124.788,74.737 159.262,74.737 164.05,69.949 164.05,63.596 170.133,57.513 172.313,57.513 J6.22 192.834,58.64 195.044,56.43 198.557,56.43 200.436,54.551 200.436,52.011 J2.13
PB14: J2.14 J6.21 J14.14 | length 62.3
  Top Layer w0.3: J14.14 149.134,69.751 158.349,69.751 169.46,58.64 J6.21 172.027,59.767 191.707,59.767 195.044,56.43 198.557,56.43 J2.14
PB15: J2.15 J6.20 J14.15 | length 70.6
  Top Layer w0.3: J14.15 146.918,70.305 158.578,70.305 168.83,60.053 171.367,60.053 172.443,61.129 173.389,61.129 J6.20
  Bottom Layer w0.3: J6.20 191.077,61.18 195.273,56.984 200.543,56.984 202.958,54.569 202.958,51.991 204.192,50.757 J2.15
PB16: J2.16 J6.19 J14.16 | length 71.3
  Top Layer w0.3: J14.16 144.702,70.859 158.808,70.859 168.487,61.18 J6.19 172.027,62.307 189.95,62.307 195.273,56.984 200.543,56.984 J2.16
PB17: J2.17 J6.18 J14.17 | length 79.3
  Top Layer w0.3: J14.17 142.486,71.413 159.037,71.413 167.857,62.593 171.367,62.593 172.443,63.669 173.089,63.669 J6.18@173.14,63.72
  Bottom Layer w0.3: J6.18 189.321,63.72 195.503,57.538 202.529,57.538 205.516,54.551 205.516,52.011 J2.17
PB18: J2.18 J6.17 J14.18 | length 80.3
  Top Layer w0.3: J14.18 140.27,71.967 159.267,71.967 167.514,63.72 J6.17 172.027,64.847 188.194,64.847 195.503,57.538 202.529,57.538 J2.18
PB19: J2.19 J6.16 J14.19 | length 88.3
  Top Layer w0.3: J14.19 138.054,72.521 159.496,72.521 166.884,65.133 171.367,65.133 172.443,66.209 173.089,66.209 J6.16@173.14,66.26
  Bottom Layer w0.3: J6.16 187.564,66.26 195.732,58.092 204.515,58.092 208.024,54.583 208.024,52.043 J2.19
PB20: J2.20 J6.15 J14.20 | length 89.3
  Top Layer w0.3: J14.20 135.838,73.075 159.726,73.075 166.541,66.26 J6.15 172.027,67.387 186.437,67.387 195.732,58.092 204.515,58.092 J2.20
PB21: J2.21 J6.14 J14.21 | length 97.3
  Top Layer w0.3: J14.21 133.622,73.629 159.955,73.629 165.911,67.673 171.367,67.673 172.443,68.749 173.089,68.749 J6.14@173.14,68.8
  Bottom Layer w0.3: J6.14 185.808,68.8 195.962,58.646 206.501,58.646 210.596,54.551 210.596,52.011 J2.21
PB22: J2.22 J6.13 J14.22 | length 98.3
  Top Layer w0.3: J14.22 131.406,74.183 160.185,74.183 165.568,68.8 J6.13 172.027,69.927 184.681,69.927 195.962,58.646 206.501,58.646 J2.22
PB23: J2.23 J6.12 J14.23 | length 106.3
  Top Layer w0.3: J14.23 129.19,74.737 160.414,74.737 164.938,70.213 171.367,70.213 172.443,71.289 173.089,71.289 J6.12@173.14,71.34
  Bottom Layer w0.3: J6.12 184.051,71.34 196.191,59.2 208.487,59.2 213.104,54.583 213.104,52.043 J2.23
PB24: J2.24 J6.11 J14.24 | length 107.3
  Top Layer w0.3: J14.24 126.983,75.3 160.635,75.3 164.595,71.34 J6.11 172.027,72.467 182.924,72.467 196.191,59.2 208.487,59.2 J2.24
PB25: J2.25 J6.10 J14.25 | length 115.3
  Top Layer w0.3: J14.25 124.813,75.9 160.818,75.9 163.965,72.753 171.367,72.753 172.443,73.829 173.089,73.829 J6.10@173.14,73.88
  Bottom Layer w0.3: J6.10 182.295,73.88 196.421,59.754 210.473,59.754 215.676,54.551 215.676,52.011 J2.25
PB26: J2.26 J6.9 | length 55.5
  Top Layer w0.3: J6.9 172.027,75.007 181.168,75.007 196.421,59.754 210.473,59.754 J2.26
PB27: J2.27 J6.8 | length 58.1
  Bottom Layer w0.3: J6.8 180.538,76.42 196.65,60.308 212.459,60.308 218.216,54.551 218.216,52.011 J2.27
PB28: J2.28 J6.7 | length 59.1
  Top Layer w0.3: J6.7 172.027,77.547 179.411,77.547 196.65,60.308 212.459,60.308 J2.28
PB29: J2.29 J6.6 | length 61.7
  Bottom Layer w0.3: J6.6 178.782,78.96 196.88,60.862 214.445,60.862 220.724,54.583 220.724,52.043 J2.29
PB30: J2.30 J6.5 | length 62.7
  Top Layer w0.3: J6.5 172.027,80.087 177.655,80.087 196.88,60.862 214.445,60.862 J2.30
PB31: J2.31 J6.4 | length 65.3
  Bottom Layer w0.3: J6.4 177.025,81.5 197.109,61.416 216.431,61.416 223.264,54.583 223.264,52.043 J2.31
PB32: J2.32 J6.3 | length 66.3
  Top Layer w0.3: J6.3 172.027,82.627 175.898,82.627 197.109,61.416 216.431,61.416 J2.32
PB33: J2.33 J6.2 | length 68.9
  Bottom Layer w0.3: J6.2 175.269,84.04 197.339,61.97 218.417,61.97 225.836,54.551 225.836,52.011 J2.33
PB34: J2.34 J6.1 | length 69.9
  Top Layer w0.3: J6.1 172.027,85.167 174.142,85.167 197.339,61.97 218.417,61.97 J2.34
pads on no net: J3.G2 J3.G3 J3.G4 J4.G1 J4.G3 J4.G4 J5.MH1 J5.MH2 J6.MH1 J6.MH2 J7.MH1 J7.MH2 J8.MH1 J8.MH2 J13.MH1 J13.MH2 J14.MH1 J14.MH2

## Silkscreen, mask and mechanical layers (free items; w line width, h text height)
Top Overlay:
  drawing of 184 lines, arcs and shapes, not listed
  text "25" at 117.815,105.102 h2 r180
  text "1" at 148.265,105.102 h2 r180
  text "26" at 117.812,94.62 h2 r180
  text "2" at 148.267,94.602 h2 r180
  text "9" at 152.099,94.148 h2 r180
  text "6" at 143.836,92.18 h2 r180
  text "34" at 87.981,84.672 h2 r180
  text "33" at 99.497,84.672 h2 r180
  text "1" at 167.352,84.684 h2 r180
  text "2" at 177.849,84.684 h2 r180
  text "1" at 42.412,84.616 h2 r180
  text "2" at 53.883,84.616 h2 r180
  text "1" at 209.852,84.604 h2 r180
  text "2" at 220.349,84.604 h2 r180
  text "1" at 56.8,83.706 h2 r180
  text "2" at 68.48,83.581 h2 r180
  text "1" at 195.28,83.527 h2 r180
  text "2" at 205.861,83.527 h2 r180
  text "32" at 87.981,82.156 h2 r180
  text "31" at 99.282,82.132 h2 r180
  text "3" at 167.352,82.132 h2 r180
  text "4" at 177.91,82.143 h2 r180
  text "1" at 142.542,77.7 h2 r180
  text "2" at 145.097,77.7 h2 r180
  text "5" at 153.317,77.7 h2 r180
  text "8" at 68.457,75.959 h2 r180
  text "7" at 56.9,75.956 h2 r180
  text "7" at 195.28,75.895 h2 r180
  text "8" at 205.844,75.895 h2 r180
  text "14" at 148.655,74.775 h2 r180
  text "25" at 118.227,74.751 h2 r180
  text "9" at 209.852,74.51 h2 r180
  text "9" at 42.412,74.456 h2 r180
  text "10" at 53.883,74.456 h2 r180
  text "10" at 221.251,74.432 h2 r180
  text "2" at 37.96,71.798 h2 r180
  text "1" at 29.023,71.764 h2 r180
  text "10" at 230.25,71.732 h2 r180
  text "9" at 238.205,71.732 h2 r180
  text "9" at 29.023,63.759 h2 r180
  text "10" at 37.96,63.756 h2 r180
  text "2" at 230.25,63.757 h2 r180
  text "1" at 237.913,63.757 h2 r180
  text "2" at 146.796,60.172 h2 r180
  text "1" at 149.416,60.172 h2 r180
  text "13" at 116.782,60.148 h2 r180
  text "2" at 43.867,56.315 h2 r180
  text "4" at 46.407,56.315 h2 r180
  text "32" at 81.967,56.315 h2 r180
  text "34" at 84.532,56.315 h2 r180
  text "2" at 186.881,56.291 h2 r180
  text "4" at 189.451,56.289 h2 r180
  text "32" at 225.467,56.291 h2 r180
  text "34" at 228.032,56.291 h2 r180
  text "1" at 43.867,49.052 h2 r180
  text "3" at 46.407,49.052 h2 r180
  text "31" at 81.967,49.051 h2 r180
  text "33" at 84.514,49.051 h2 r180
  text "1" at 186.731,49.052 h2 r180
  text "3" at 189.416,49.029 h2 r180
  text "31" at 225.367,49.028 h2 r180
  text "33" at 228.014,49.028 h2 r180
  text "4" at 87.981,46.583 h2 r180
  text "31" at 167.402,46.572 h2 r180
  text "32" at 178.823,46.572 h2 r180
  text "3" at 98.501,46.521 h2 r180
  text "2" at 87.981,44.044 h2 r180
  text "1" at 98.356,44.044 h2 r180
  text "33" at 167.402,44.032 h2 r180
  text "34" at 178.873,44.032 h2 r180
  text "A" at 84.497,38.6 h5 r180
  text "B" at 183.168,38.6 h5 r180
Bottom Overlay:
  drawing of 184 lines, arcs and shapes, not listed
  text "25" at 115.923,104.1 h2 r180
  text "1" at 146.433,104.1 h2 r180
  text "26" at 115.927,95.62 h2 r180
  text "2" at 146.433,95.602 h2 r180
  text "6" at 142.002,89.18 h2 r180
  text "9" at 150.113,89.18 h2 r180
  text "34" at 87.121,84.672 h2 r180
  text "33" at 96.649,84.672 h2 r180
  text "1" at 166.789,84.684 h2 r180
  text "2" at 176.988,84.684 h2 r180
  text "1" at 42.703,84.616 h2 r180
  text "2" at 51.048,84.616 h2 r180
  text "1" at 209.289,84.604 h2 r180
  text "2" at 219.488,84.604 h2 r180
  text "1" at 57.238,83.706 h2 r180
  text "2" at 65.616,83.581 h2 r180
  text "1" at 194.717,83.527 h2 r180
  text "2" at 205,83.527 h2 r180
  text "32" at 87.147,82.156 h2 r180
  text "31" at 96.756,82.132 h2 r180
  text "3" at 166.5,82.132 h2 r180
  text "3" at 167.352,82.132 h2 r180
  text "4" at 176.988,82.143 h2 r180
  text "1" at 140.708,80.7 h2 r180
  text "2" at 143.263,80.7 h2 r180
  text "5" at 151.483,80.7 h2 r180
  text "7" at 57.099,75.956 h2 r180
  text "8" at 65.625,75.956 h2 r180
  text "7" at 194.439,75.895 h2 r180
  text "8" at 205,75.895 h2 r180
  text "8" at 205.844,75.895 h2 r180
  text "14" at 146.845,74.775 h2 r180
  text "25" at 116.333,74.751 h2 r180
  text "9" at 208.987,74.51 h2 r180
  text "9" at 42.556,74.456 h2 r180
  text "10" at 51.048,74.456 h2 r180
  text "10" at 219.488,74.432 h2 r180
  text "2" at 35.625,71.798 h2 r180
  text "1" at 28.963,71.762 h2 r180
  text "10" at 228.487,71.732 h2 r180
  text "9" at 237.35,71.732 h2 r180
  text "9" at 28.669,63.756 h2 r180
  text "10" at 35.625,63.756 h2 r180
  text "2" at 229.389,63.757 h2 r180
  text "1" at 237.35,63.757 h2 r180
  text "2" at 145.934,60.172 h2 r180
  text "1" at 148.854,60.172 h2 r180
  text "13" at 115.008,60.148 h2 r180
  text "2" at 42.033,56.315 h2 r180
  text "4" at 44.573,56.315 h2 r180
  text "32" at 80.133,56.315 h2 r180
  text "34" at 82.648,56.315 h2 r180
  text "2" at 186.019,56.291 h2 r180
  text "4" at 188.529,56.289 h2 r180
  text "32" at 223.633,56.291 h2 r180
  text "34" at 226.148,56.291 h2 r180
  text "1" at 42.033,49.052 h2 r180
  text "3" at 44.573,49.052 h2 r180
  text "31" at 80.133,49.051 h2 r180
  text "33" at 82.666,49.051 h2 r180
  text "1" at 186.169,49.052 h2 r180
  text "3" at 188.564,49.029 h2 r180
  text "31" at 223.733,49.028 h2 r180
  text "33" at 226.166,49.028 h2 r180
  text "B" at 180.488,46.6 h5 r180
  text "4" at 88.089,46.583 h2 r180
  text "31" at 165.769,46.572 h2 r180
  text "32" at 176.988,46.572 h2 r180
  text "3" at 96.649,46.521 h2 r180
  text "2" at 88.119,44.044 h2 r180
  text "1" at 96.794,44.044 h2 r180
  text "33" at 165.554,44.032 h2 r180
  text "34" at 176.988,44.032 h2 r180
  text "A" at 81.285,38.6 h5 r180
  text "B" at 180.635,38.601 h5 r180
Mechanical 1:
  circle w0.254: c187.96,78.732 r5.125
  circle w0.254: c187.96,94.329 r6.1
  circle w0.254: c76.485,94.272 r6.1
  circle w0.254: c76.485,78.675 r5.125
  lines w0.254: 25.67,105.5 ccw(c25.67,105.5) 25.67,105.5 ; 25.67,105.5 23.47,105.5 ccw(c23.47,104.23) 22.2,104.23 22.2,99.772 22.2,36.482 22.2,30.995 ccw(c23.47,30.995) 23.47,29.725 25.67,29.725 27.42,29.725 39.622,29.725 42.325,29.725 215.35,29.725 224.275,29.725 229.58,29.725 239.48,29.725 ccw(c239.48,30.995) 240.75,30.995 240.75,43.368 240.75,95 240.75,104.23 ccw(c239.48,104.23) 239.48,105.5 229.58,105.5 93.154,105.5 86.7,105.5 39.67,105.5 27.42,105.5 25.67,105.5 ; 69.385,78.718 69.385,94.289 ; 69.385,78.718 69.385,77.85 ccw(c74.685,77.85) 74.685,72.55 78.285,72.55 ccw(c78.285,77.85) 83.585,77.85 83.585,78.705 ; 69.385,78.718 69.385,78.705 83.585,78.705 ; 69.385,94.289 69.385,96.129 cw(c74.685,96.129) 74.685,101.429 78.285,101.429 cw(c78.285,96.129) 83.585,96.129 83.585,94.267 ; 69.385,94.289 83.585,94.267 ; 83.585,78.705 83.585,84.129 83.585,94.267 ; 180.86,78.775 180.86,77.907 ccw(c186.16,77.907) 186.16,72.607 189.76,72.607 ccw(c189.76,77.907) 195.06,77.907 195.06,78.762 ; 180.86,78.775 180.86,94.346 ; 180.86,78.775 180.86,78.762 195.06,78.762 ; 180.86,94.346 195.06,94.324 ; 180.86,94.346 180.86,96.186 cw(c186.16,96.186) 186.16,101.486 189.76,101.486 cw(c189.76,96.186) 195.06,96.186 195.06,94.324 ; 195.06,78.762 195.06,84.186 195.06,94.324